# Altium PCB Chiller.PcbDoc (part 1 of 2)
Units mil, origin at the board's own origin, x right, y up, seen from the top; angles counter-clockwise.
Board outline 5081 x 4370 mil, 2 copper layers (Top Layer, Bottom Layer); 139 components, 120 nets, 485 pads, 196 vias.
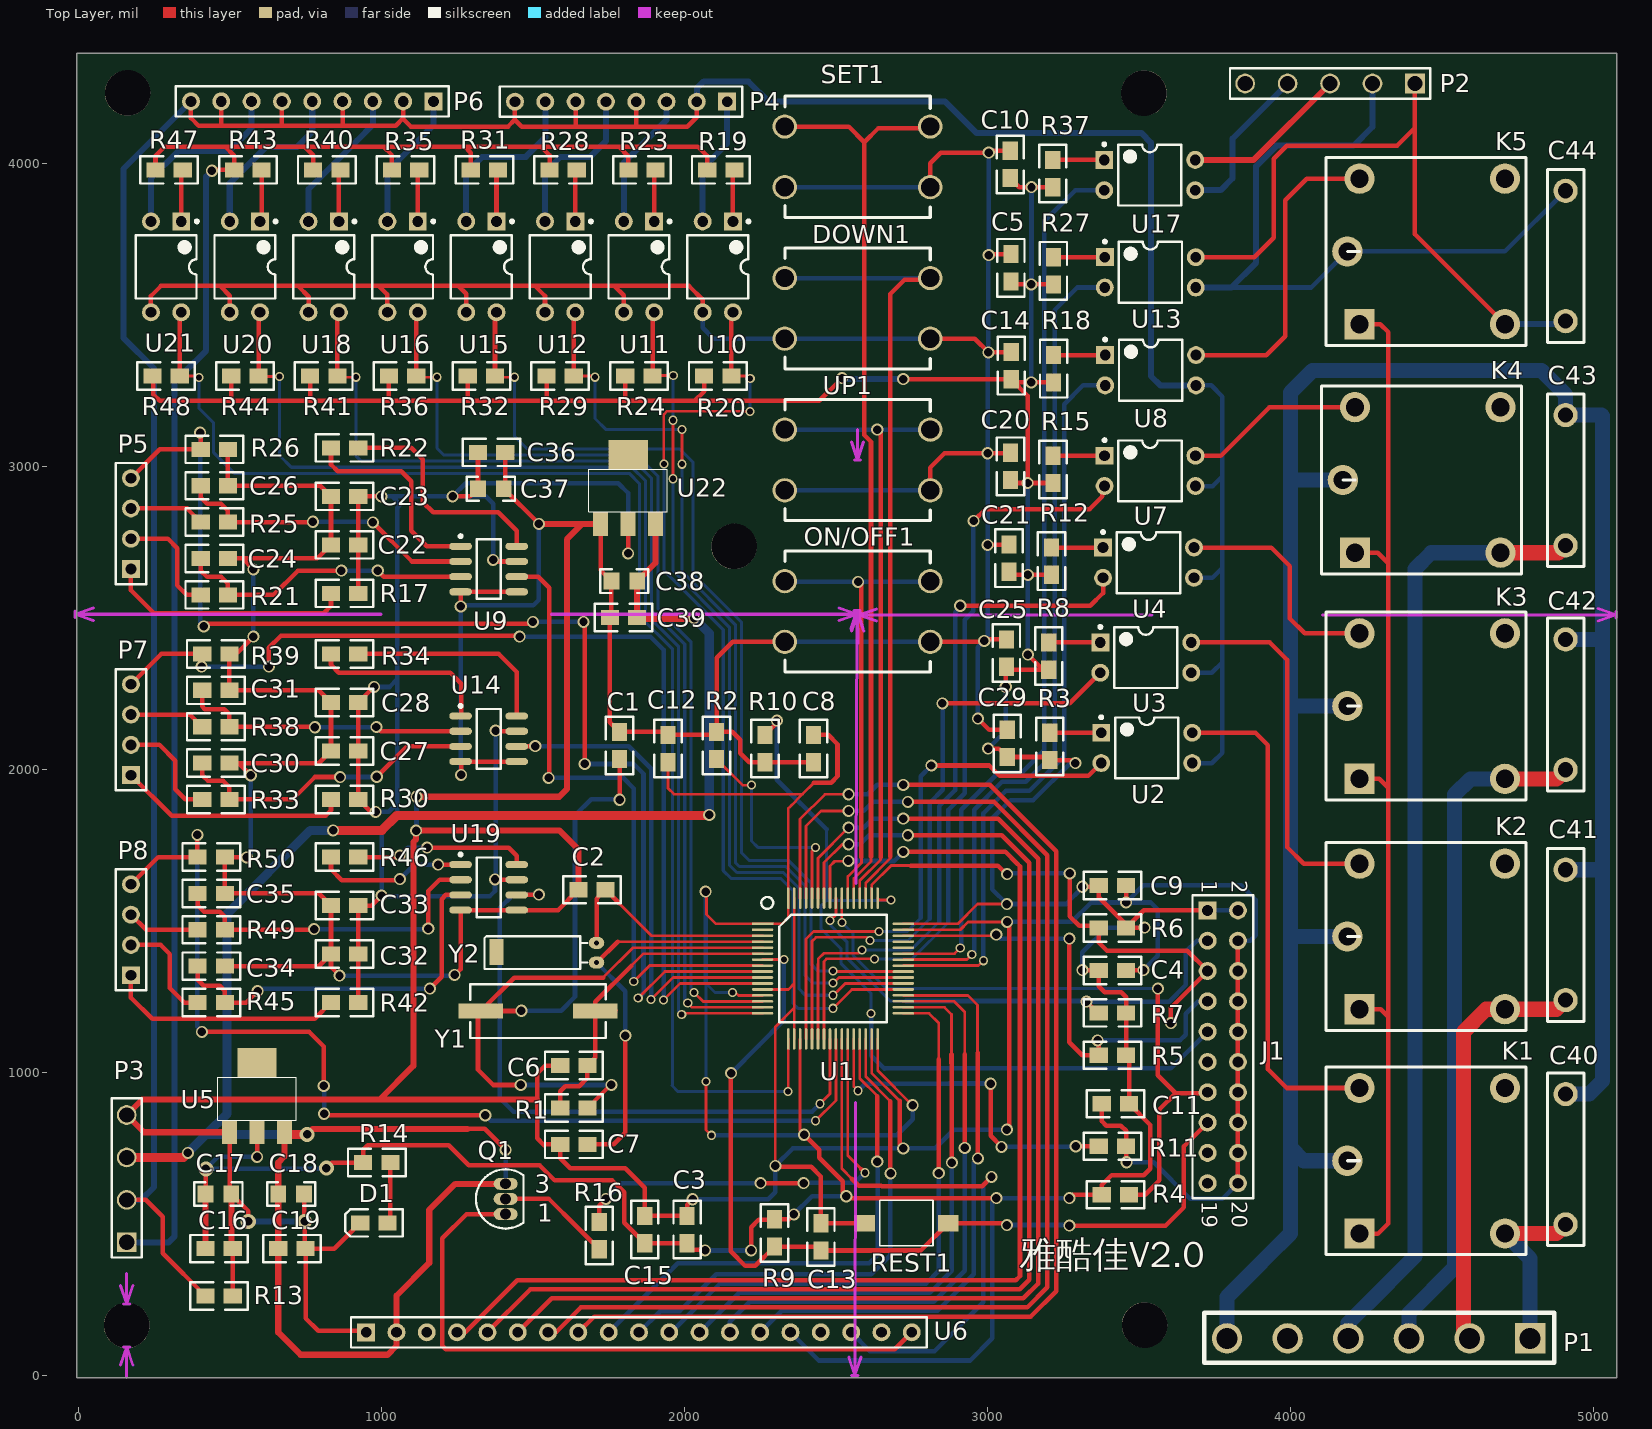
[diagram p0: Top Layer view]
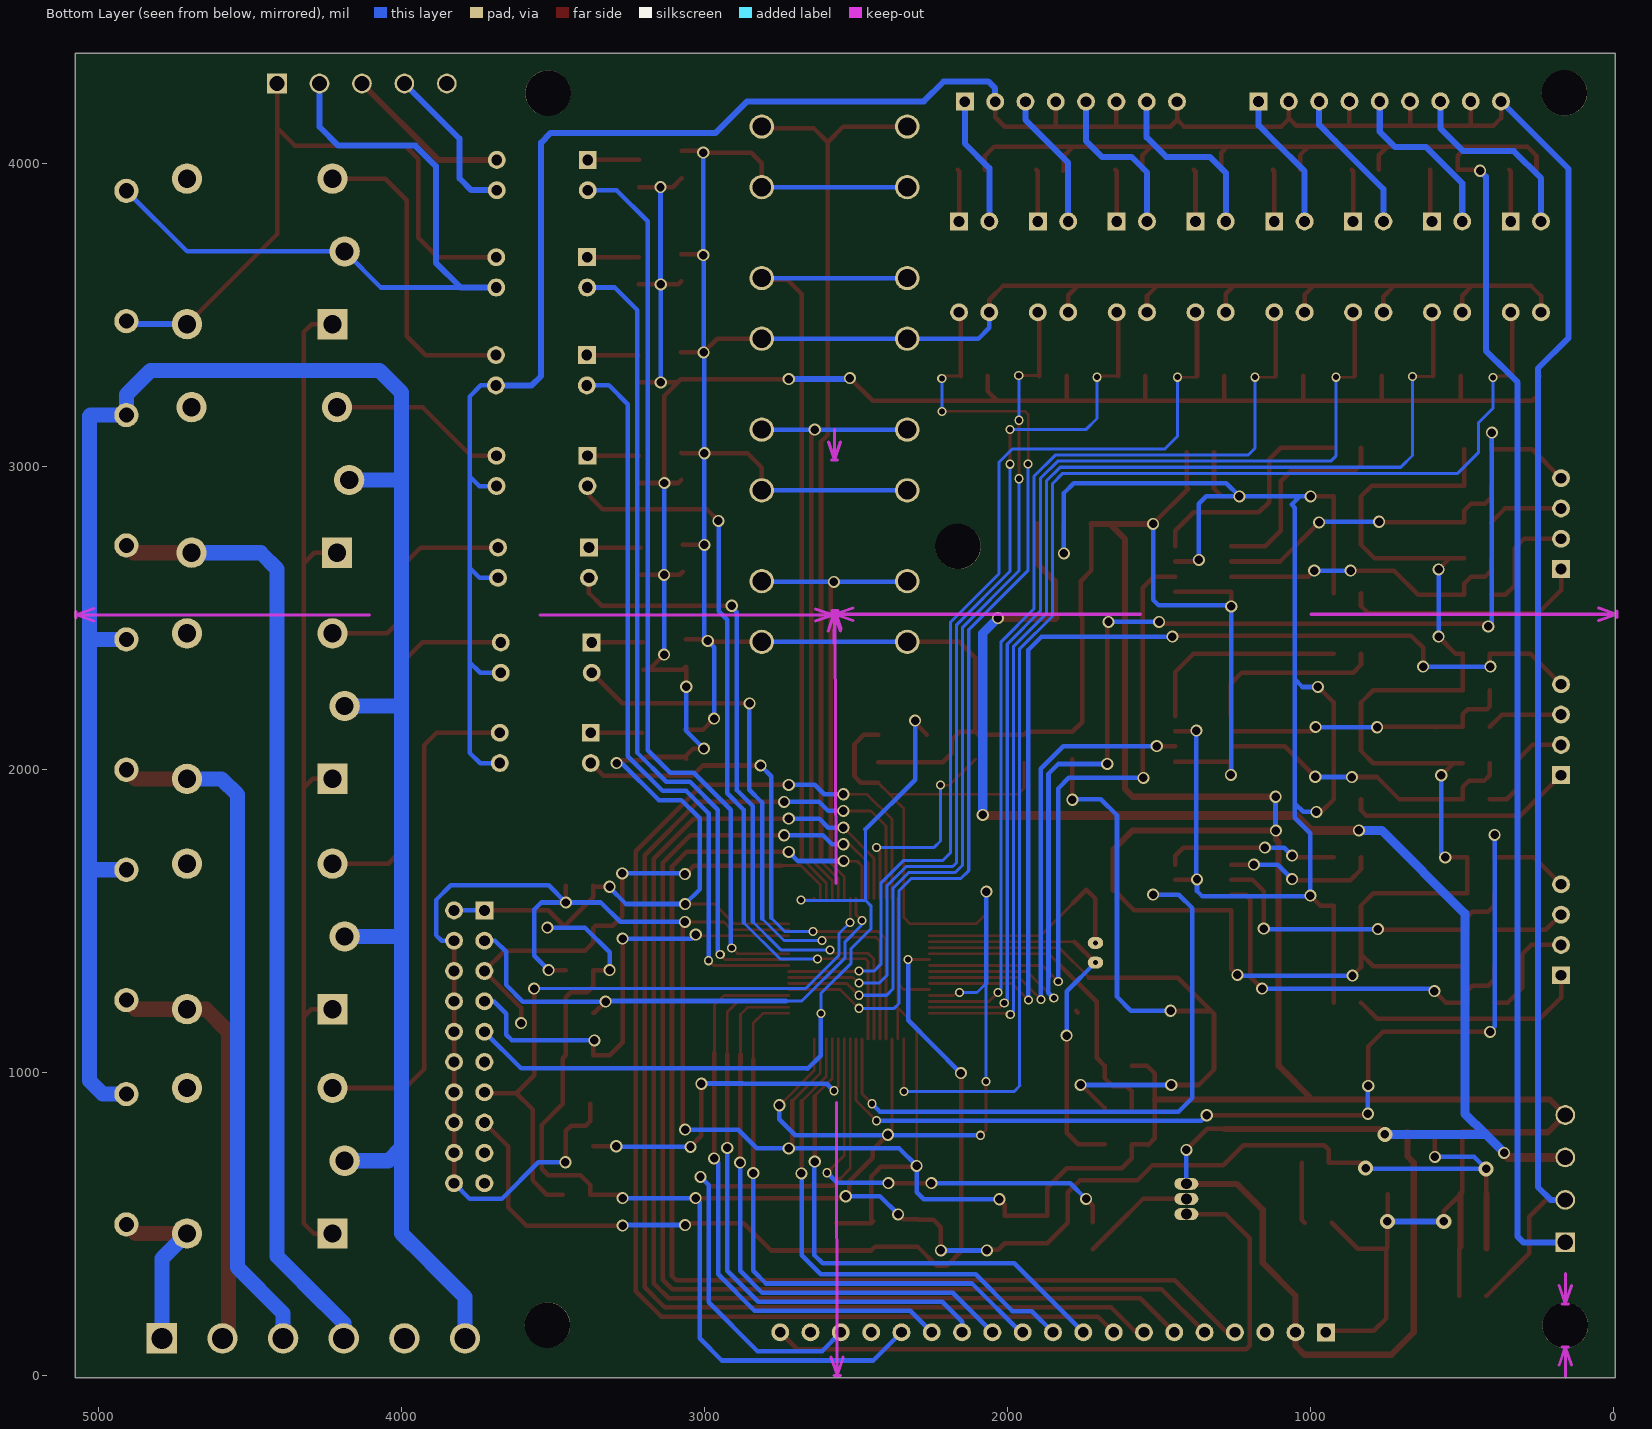
[diagram p1: Bottom Layer view, seen from below]

## Layer stack, top to bottom
Top Layer: signal copper 1.4
Dielectric: dielectric 12.6, FR-4, Dk 4.8
Bottom Layer: signal copper 1.4

## Board outline
-5,4363 5076,4363 5076,-7 -5,-7 -5,4363

## Design rules (kind name [scope] priority, off if disabled: settings)
Clearance [All] p1: gap=10
PolygonConnect [All] p1: connectstyle=Relief reliefconductorwidth=10 reliefentries=4 polygonreliefangle="90 Angle"
RoutingVias [All] p1: holewidth=28 width=50 viastyle="Through Hole" minholewidth=20 minwidth=30 maxholewidth=28 maxwidth=50
SilkscreenOverComponentPads [All] p1: minsilkscreentomaskgap=10
SolderMaskExpansion [All] p1: expansion=4
Width [All] p1: maxlimit=50 minlimit=5 preferedwidth=10
27 further rules are at their usual default settings.

## Components (designator, comment, footprint, x,y, rotation, side; value= is the part's Value field where it differs from the comment)
C1 "20pF" 0805 1786,2124 r270 top
C2 "12pF" 0805 1650,1603 r0 top
C3 "104" 0805 2009,527 r270 top
C4 "104" 0805 3367,1337 r0 top
C5 "0.1uF" 0805 3077,3700 r270 top
C6 "20pF" 0805 1590,1023 r0 top
C7 "12pF" 0805 1590,763 r0 top
C8 "104" 0805 2426,2024 r90 top
C9 "104" 0805 3367,1617 r0 top
C10 "0.1uF" 0805 3075,4041 r270 top
C11 "104" 0805 3467,897 r180 top
C12 "104" 0805 1946,2024 r90 top
C13 "104" 0805 2450,503 r270 top
C14 "0.1uF" 0805 3078,3377 r270 top
C15 "104" 0805 1869,437 r90 top
C16 "104" 0805 420,419.03 r0 top
C17 "106" RC0805 420,599.03 r0 top
C18 "106" RC0805 660,599.03 r0 top
C19 "104" 0805 660,419.03 r0 top
C20 "0.1uF" 0805 3076,3045 r270 top
C21 "0.1uF" 0805 3071,2742 r270 top
C22 "0.1uF" 0805 834,2741 r0 top
C23 "0.1uF" 0805 834,2901 r0 top
C24 "0.1uF" 0805 404,2696 r0 top
C25 "0.1uF" 0805 3062,2429 r270 top
C26 "0.1uF" 0805 404,2936 r0 top
C27 "0.1uF" 0805 834,2061 r0 top
C28 "0.1uF" 0805 834,2221 r0 top
C29 "0.1uF" 0805 3065,2131 r270 top
C30 "0.1uF" 0805 409,2021 r0 top
C31 "0.1uF" 0805 409,2261 r0 top
C32 "0.1uF" 0805 834,1391 r0 top
C33 "0.1uF" 0805 834,1551 r0 top
C34 "0.1uF" 0805 394,1351 r0 top
C35 "0.1uF" 0805 394,1591 r0 top
C36 "104" 0805 1319,3046 r0 top
C37 "106" RC0805 1319,2926 r0 top
C38 "106" RC0805 1844,2621 r180 top
C39 "104" 0805 1844,2501 r180 top
C40 "0.1uF" cccc 4907,929 r0 top
C41 "0.1uF" cccc 4907,1669 r0 top
C42 "0.1uF" cccc 4907,2429 r0 top
C43 "0.1uF" cccc 4907,3169 r0 top
C44 "0.1uF" cccc 4907,3909 r0 top
D1 "LED0" LED0805 1020,504.03 r180 top
DOWN1 "SW-PB" SW 2331,3421 r180 top
J1 "10X2H" HDR2X10 3726,1535 r270 top
K1 "Relay-SPST" JQC-3FF 4227,469 r0 top
K2 "Relay-SPST" JQC-3FF 4227,1209 r0 top
K3 "Relay-SPST" JQC-3FF 4227,1969 r0 top
K4 "Relay-SPST" JQC-3FF 4212,2715 r0 top
K5 "Relay-SPST" JQC-3FF 4227,3469 r0 top
ON/OFF1 "SW-PB" SW 2331,2421 r180 top
P1 "Header 6H" 7P 4790,123 r270 top
P2 "Header 5" P5 4410,4263 r180 top
P3 "CON4" P4 160,440 r90 top
P4 "Header 8" HDR1X8 2141,4203 r180 top
P5 "CON4" 2.54X4 174,2661 r90 top
P6 "Header 9" HDR1X9 1172,4204 r180 top
P7 "CON4" 2.54X4 174,1981 r90 top
P8 "CON4" 2.54X4 174,1321 r90 top
Q1 "8050" BCY-W3/E4 1410,583 r0 top
R1 "1M" 0805 1590,883 r0 top
R2 "10K" 0805 2106,2124 r270 top
R3 "499" 0805 3205,2031 r90 top
R4 "10K" 0805 3467,597 r180 top
R5 "10K" 0805 3367,1057 r0 top
R6 "10K" 0805 3367,1477 r0 top
R7 "10K" 0805 3367,1197 r0 top
R8 "499" 0805 3202,2329 r90 top
R9 "10K" 0805 2297,426 r90 top
R10 "10K" 0805 2266,2024 r90 top
R11 "10K" 0805 3367,757 r0 top
R12 "499" 0805 3211,2642 r90 top
R13 "0" 0805 510,263 r180 top
R14 "510R" 0805 1030,703 r180 top
R15 "499" 0805 3216,2945 r90 top
R16 "1K" 0805 1719,507 r270 top
R17 "2.0K 0.1% 25ppm" 0805 834,2581 r0 top
R18 "499" 0805 3218,3277 r90 top
R19 "1K" 0805 2165,3978 r180 top
R20 "10K" 0805 2065,3298 r0 top
R21 "1.0K" 0805 404,2576 r0 top
R22 "10.0K 0.1% 25ppm" 0805 834,3061 r0 top
R23 "1K" 0805 1905,3978 r180 top
R24 "10K" 0805 1805,3298 r0 top
R25 "1.0K" 0805 404,2816 r0 top
R26 "1.0K 0.1% 25ppm" 0805 404,3056 r0 top
R27 "499" 0805 3217,3600 r90 top
R28 "1K" 0805 1645,3978 r180 top
R29 "10K" 0805 1545,3298 r0 top
R30 "2.0K 0.1% 25ppm" 0805 834,1901 r0 top
R31 "1K" 0805 1385,3978 r180 top
R32 "10K" 0805 1285,3298 r0 top
R33 "1.0K" 0805 409,1901 r0 top
R34 "10.0K 0.1% 25ppm" 0805 834,2381 r0 top
R35 "1K" 0805 1125,3978 r180 top
R36 "10K" 0805 1025,3298 r0 top
R37 "499" 0805 3215,3921 r90 top
R38 "1.0K" 0805 409,2141 r0 top
R39 "1.0K 0.1% 25ppm" 0805 409,2381 r0 top
R40 "1K" 0805 865,3978 r180 top
R41 "10K" 0805 765,3298 r0 top
R42 "2.0K 0.1% 25ppm" 0805 834,1231 r0 top
R43 "1K" 0805 605,3978 r180 top
R44 "10K" 0805 505,3298 r0 top
R45 "1.0K" 0805 394,1231 r0 top
R46 "10.0K 0.1% 25ppm" 0805 834,1711 r0 top
R47 "1K" 0805 345,3978 r180 top
R48 "10K" 0805 245,3298 r0 top
R49 "1.0K" 0805 394,1471 r0 top
R50 "1.0K 0.1% 25ppm" 0805 394,1711 r0 top
REST1 "" SW-SPST 2870,503 r180 top
SET1 "SW-PB" SW 2331,3921 r180 top
U1 "STM32F103RCT6" QFP-64 2490,1343 r0 top
U2 "PC817" DIP-4 3525,2071 r0 top
U3 "PC817" DIP-4 3522,2369 r0 top
U4 "PC817" DIP-4 3531,2682 r0 top
U5 "AMS1117-3.3" SOT223 590,984.03 r0 top
U6 "LCD12864" HDR1X19 950,143 r0 top
U7 "PC817" DIP-4 3536,2985 r0 top
U8 "PC817" DIP-4 3538,3317 r0 top
U9 "AD623AR" SOIC127P600-8L 1354,2661 r0 top
U10 "PC817" DIP-4 2110,3658 r270 top
U11 "PC817" DIP-4 1850,3658 r270 top
U12 "PC817" DIP-4 1590,3658 r270 top
U13 "PC817" DIP-4 3537,3640 r0 top
U14 "AD623AR" SOIC127P600-8L 1354,2101 r0 top
U15 "PC817" DIP-4 1330,3658 r270 top
U16 "PC817" DIP-4 1070,3658 r270 top
U17 "PC817" DIP-4 3535,3961 r0 top
U18 "PC817" DIP-4 810,3658 r270 top
U19 "AD623AR" SOIC127P600-8L 1354,1611 r0 top
U20 "PC817" DIP-4 550,3658 r270 top
U21 "PC817" DIP-4 290,3658 r270 top
U22 "AMS1117-3.3" SOT223 1814,2991 r0 top
UP1 "SW-PB" SW 2331,2921 r180 top
Y1 "8MHz" smt-xtal 1330,1203 r0 top
Y2 "32.768k" 32.768k 1710,1363 r90 top

## Footprints (in the part's own frame and the unit in brackets; to place one, negate y for a bottom-side part, rotate by r counter-clockwise, add the part's x,y. Pads: shape width x height; smd on the part's side, far side on the other; paste and mask are expansions set on the pad)
2.54X4 [mm]
  rect 1.5x1.5 hole 0.9: 1(0,0)
  round 1.5 hole 0.9: 2(2.54,0) 3(5.08,0) 4(7.62,0)
  silkscreen extent -1.27,-1.27 8.89,1.27
7P [mil]
  rect 100x100 hole 70: 1(0,0)
  round 100 hole 70: 2(0,-200) 3(0,-400) 4(0,-600) 5(0,-800) 6(0,-1000)
  silkscreen extent -85,-1075 80,80
32.768k [mm]
  oval 1x1.3 hole 0.4: 1(0,0) 2(1.64,0)
  rect 2.2x1.2 smd: 3(0.875,8.382)
  silkscreen extent -0.53,0.76 2.2,9.4
0805 [mil]
  rect 60x50 smd: 1(0,0) 2(90,0)
  silkscreen extent -50,-45 140,45
BCY-W3/E4 [mm] "TO, Flat Index; 3 In-Line, Axial Leads; Body Dia. 4.5mm; Leads 0.51 x 0.48 mm (max)"
  oval 2x1 hole 0.9: 1(0,-1.27) 2(0,0) 3(0,1.27)
  silkscreen extent -2.48,-2.48 1.5,2.48
cccc [mil]
  round 80 hole 50: 1(0,0) 2(0,-430)
  silkscreen extent -60,-500 60,70
DIP-4 [mm] "DIP; 4 Leads; Row Spacing 7.62 mm; Pitch 2.54 mm"
  rect 1.5x1.5 hole 0.9: 1(-3.81,1.27)
  round 1.5 hole 0.9: 2(-3.81,-1.27) 3(3.81,-1.27) 4(3.81,1.27)
  silkscreen extent -3.93,-2.55 2.65,2.69, body extent -3.15,-2.5 3.15,2.5, height 5.6
HDR1X8 [mm] "Connector; Header; 8 Position"
  rect 1.5x1.5 hole 0.9: 1(0,0)
  round 1.5 hole 0.9: 2(2.54,0) 3(5.08,0) 4(7.62,0) 5(10.16,0) 6(12.7,0) 7(15.24,0) 8(17.78,0)
  silkscreen extent -1.27,-1.27 19.05,1.27
HDR1X9 [mm] "Connector; Header; 9 Position"
  rect 1.5x1.5 hole 0.9: 1(0,0)
  round 1.5 hole 0.9: 2(2.54,0) 3(5.08,0) 4(7.62,0) 5(10.16,0) 6(12.7,0) 7(15.24,0) 8(17.78,0) 9(20.32,0)
  silkscreen extent -1.27,-1.27 21.59,1.27
HDR1X19 [mm] "Connector; Header; 19 Position"
  rect 1.5x1.5 hole 0.9: 1(0,0)
  round 1.5 hole 0.9: 2(2.54,0) 3(5.08,0) 4(7.62,0) 5(10.16,0) 6(12.7,0) 7(15.24,0) 8(17.78,0) 9(20.32,0) 10(22.86,0) 11(25.4,0) 12(27.94,0) 13(30.48,0) 14(33.02,0) 15(35.56,0) 16(38.1,0) 17(40.64,0) 18(43.18,0) 19(45.72,0)
  silkscreen extent -1.27,-1.27 46.99,1.27
HDR2X10 [mm] "Connector; Header; 10x2 Position"
  rect 1.5x1.5 hole 0.9: 1(0,0)
  round 1.5 hole 0.9: 2(0,2.54) 3(2.54,0) 4(2.54,2.54) 5(5.08,0) 6(5.08,2.54) 7(7.62,0) 8(7.62,2.54) 9(10.16,0) 10(10.16,2.54) 11(12.7,0) 12(12.7,2.54) 13(15.24,0) 14(15.24,2.54) 15(17.78,0) 16(17.78,2.54) 17(20.32,0) 18(20.32,2.54) 19(22.86,0) 20(22.86,2.54)
  silkscreen extent -1.27,-1.27 24.13,3.81
JQC-3FF [mil]
  round 100 hole 60: 1(480,0) 2(-40,240) 4(0,480) 5(480,480)
  rect 100x100 hole 60: 3(0,0)
  silkscreen extent -110,-70 550,550
LED0805 [mil] "0805"
  rect 60x50 smd: 1(-0.28,-0.09) 2(89.72,-0.09)
  silkscreen extent -50,-45 140,45
P4 [mil]
  rect 65x65 hole 50: 1(0,0)
  round 65 hole 50: 2(140,0) 3(280,0) 4(420,0)
  silkscreen extent -50,-50 475,50
P5 [mil]
  rect 65x65 hole 50: 1(0,0)
  round 65 hole 50: 2(140,0) 3(280,0) 4(420,0) 5(560,0)
  silkscreen extent -50,-50 610,50
QFP-64 [mm]
  rect 1.8x0.22 smd: 1(-5.904,3.752)
  oval 1.8x0.22 smd: 2(-5.904,3.252) 3(-5.904,2.752) 4(-5.904,2.252) 5(-5.904,1.752) 6(-5.904,1.252) 7(-5.904,0.752) 8(-5.904,0.252) 9(-5.904,-0.248) 10(-5.904,-0.748) 11(-5.904,-1.248) 12(-5.904,-1.748) 13(-5.904,-2.248) 14(-5.904,-2.748) 15(-5.904,-3.248) 16(-5.904,-3.748) 33(5.896,-3.748) 34(5.896,-3.248) 35(5.896,-2.748) 36(5.896,-2.248) 37(5.896,-1.748) 38(5.896,-1.248) 39(5.896,-0.748) 40(5.896,-0.248) 41(5.896,0.252) 42(5.896,0.752) 43(5.896,1.252) 44(5.896,1.752) 45(5.896,2.252) 46(5.896,2.752) 47(5.896,3.252) 48(5.896,3.752)
  oval 0.22x1.8 smd: 17(-3.754,-5.898) 18(-3.254,-5.898) 19(-2.754,-5.898) 20(-2.254,-5.898) 21(-1.754,-5.898) 22(-1.254,-5.898) 23(-0.754,-5.898) 24(-0.254,-5.898) 25(0.246,-5.898) 26(0.746,-5.898) 27(1.246,-5.898) 28(1.746,-5.898) 29(2.246,-5.898) 30(2.746,-5.898) 31(3.246,-5.898) 32(3.746,-5.898) 49(3.746,5.902) 50(3.246,5.902) 51(2.746,5.902) 52(2.246,5.902) 53(1.746,5.902) 54(1.246,5.902) 55(0.746,5.902) 56(0.246,5.902) 57(-0.254,5.902) 58(-0.754,5.902) 59(-1.254,5.902) 60(-1.754,5.902) 61(-2.254,5.902) 62(-2.754,5.902) 63(-3.254,5.902) 64(-3.754,5.902)
  silkscreen extent -6,-4.5 4.5,6
RC0805 [mil]
  rect 52x56 smd: 1(0,0) 2(85,0)
  silkscreen extent -37,-39 122,39
smt-xtal [mil]
  rect 146x51 smd: 1(-2,0) 2(376,0)
  silkscreen extent -37,-89 411,89
SOIC127P600-8L [mm] "SOIC, 8-Leads, Body 4.9x3.9mm, Pitch 1.27mm, IPC High Density"
  oval 1.9x0.6 smd: 1(-2.35,1.905) 2(-2.35,0.635) 3(-2.35,-0.635) 4(-2.35,-1.905) 5(2.35,-1.905) 6(2.35,-0.635) 7(2.35,0.635) 8(2.35,1.905)
  silkscreen extent -2.47,-2.5 1,2.88, body extent -2,-2.5 2,2.5, height 1.75
SOT223 [mm]
  rect 1.27x2 smd: 1(-2.3,-4.598) 2(0,-4.598) 3(2.3,-4.598)
  rect 3.3x2.5 smd: ""(0,1.2)
  silkscreen extent -3.3,-3.58 3.3,0
SW [mil]
  round 80 hole 60: 1(-480,0) 1(0,0) 2(-480,-200) 2(0,-200)
  silkscreen extent -480,-300 0,100
SW-SPST [mm]
  rect 1.7x1.4 smd: 1(0,0) 2(7,0)
  silkscreen extent 1.27,-1.91 5.71,1.91

## Part data
C1 C2 C6 C7: library part CAP, "CAP CHIP 20P 50V(+-5% C0G 0603)"
C3 C4 C8 C11 C12 C15: library part CAP
C5 C10 C14 C19 C20 C21 C22 C23 C24 C25 C26 C27 C28 C29 C30 C31 C32 C33 C34 C35 C39 C40 C41 C42 C43 C44: library part CAP, "Capacitor"
C9 C13: library part CAP, "GRM39 X7R102K50PT"
C16 C36: library part Cap, "Capacitor"
C17 C18 C37 C38: library part "CAPACITOR POL", "Capacitor"
D1: "Typical INFRARED GaAs LED"
J1: library part "Header 10X2H", "Header, 10-Pin, Dual row, Right Angle"
K1 K2 K3 K4 K5: "Single-Pole Single-Throw Relay"
P1: "Header, 6-Pin, Right Angle"
P2: "Header, 5-Pin"
P3: library part "Header 4", "Header, 4-Pin"
P4: "Header, 8-Pin"
P5 P7 P8: "Connector"
P6: "Header, 9-Pin"
Q1: library part 2N3904, "NPN General Purpose Amplifier"
R1 R2 R3 R4 R5 R6 R7 R8 R9 R10 R11 R12 R13 R15 R16 R18 R19 R20 R23 R24 R27 R28 R29 R31 R32 R35 R36 R37 R40 R41 R43 R44 R47 R48: library part RES
R14: library part R
R17 R21 R22 R25 R26 R30 R33 R34 R38 R39 R42 R45 R46 R49 R50: library part RES2
REST1: library part SW-PB
U1: library part STM32F103RBT6
U2 U3 U4 U7 U8 U10 U11 U12 U13 U15 U16 U17 U18 U20 U21: library part Optoisolator1, "4-Pin Phototransistor Optocoupler"
U5 U22: library part LT1085CM-3.3
U9 U14 U19: library part Component_1
Y1 Y2: library part CRYSTAL, "Crystal 8MHz PLUG"

## Free pads (board coordinates)
  round 150 hole 150: 0(160,166) 0(163,4232) 0(2163.57,2735.57) 0(3516,4231) 0(3518,167)

## Via types
v1: diameter 40, hole 28, Top Layer to Bottom Layer, 144 vias
v2: diameter 30, hole 20, Top Layer to Bottom Layer, 47 vias
v3: diameter 50, hole 28, Top Layer to Bottom Layer, 5 vias

## Nets (pads, with @x,y where several pads share a name; then routed paths per layer and width w, separated by ;. In a path a pad name is that pad's centre, name@x,y a point inside that pad or via, vN(x,y) a via of type N, cw(c..) or ccw(c..) an arc to the next point about the centre after c; other vN are vias at no path point)
+12V: K1.3 K2.3 K3.3 K4.3 K5.3 | length 3493.5
  Top Layer w15: K4.3@4212,2715 4287,2715 4322,2680 ; K1.3@4227,469 4228,468 4288,468 4322,502 4322,1184 ; K2.3@4227,1209 4297,1209 4322,1184 ; K3.3@4227,1969 4292,1969 4322,1939 ; K5.3@4227,3469 4296,3469 4322,3443 4322,3434 4322,2680 ; 4322,1184 4322,1939 ; 4322,1939 4322,2680
BOOT0: R2.2 U1.60 | length 730.9
  Top Layer w9: R2.2@2106,2034 2108,2032 2192,1948 v2(2221,1948) ; U1.60@2420.95,1575.38 2420.95,1730.95 v2(2433,1743)
  Bottom Layer w10: v2(2221,1948) 2221,1764 2242,1743 v2(2433,1743)
  Bottom Layer w15: v2@2430,1743 v2(2433,1743)
BOOT1: R11.1 U1.28 | length 1305.8
  Top Layer w9: U1.28@2558.75,1110.81 2558.75,954.25 v2(2573,940)
  Top Layer w15: v1(3010,963) 3010,791 v1(3046,755) ; v1(3291,757) R11.1@3367,757
  Bottom Layer w15: v2(2573,940) 2596,963 v1(3010,963) 3008,965 2873,965 ; v1(3046,755) 3289,755 v1(3291,757)
COMPRESSOR: C42.2 K3.1 P1.3 | length 2256.5
  Top Layer w50: K3.1@4707,1969 4877,1969 C42.2@4907,1999
  Bottom Layer w50: P1.3@4390,123 4390,206 4541,357 4541,1917 4593,1969 K3.1@4707,1969
DB0: U1.61 U6.7 | length 4273.8
  Top Layer w9: U1.61@2401.27,1575.38 2401.27,1813.27 2451,1863 v1(2541.52,1863)
  Top Layer w15: U6.7@1550,143 1576.42,143 1658.45,225.03 3130.6,225.03 3197,291.43 3197,1717.28 3021.28,1893 v1(2737.5,1893)
  Bottom Layer w15: v1(2541.52,1863) 2592.02,1863 2622.02,1893 v1(2737.5,1893)
DB1: U1.62 U6.8 | length 4327.7
  Top Layer w9: U1.62@2381.58,1575.38 2381.58,1836.01 2463.57,1918 v1(2541.52,1918)
  Top Layer w15: U6.8@1650,143 1702.03,195.03 3143.03,195.03 3227,279 3227,1729.71 3007.71,1949 v1(2722,1949)
  Bottom Layer w15: v1(2541.52,1918) 2604.59,1918 2635.59,1949 v1(2722,1949)
DB2: U1.29 U6.9 | length 1732.3
  Top Layer w9: U1.29@2578.43,1110.81 2578.43,980.18 2636.5,922.11
  Top Layer w15: v1(2636,706.3) 2636.5,706.79 2636.5,922.11
  Bottom Layer w15: U6.9@1750,143 1977.5,370.5 2610.07,370.5 2637.52,397.95 v1@2637.52,705 ; v1(2636,706.3) 2637.3,705 v1@2637.52,705 ; v1@2637.52,706.3 v1@2637.52,705
DB3: U1.30 U6.10 | length 1682.4
  Top Layer w9: U1.30@2598.12,1110.81 2598.12,986.39 2678.5,906
  Top Layer w15: 2678.5,906 2678.5,669.02 v1(2680.02,667.5)
  Bottom Layer w15: U6.10@1850,143 1919.84,212.84 1983.84,212.84 2105,334 2616,334 2679,397 2679,660 2680.02,661.02 v1(2680.02,667.5)
DB4: U1.33 U6.11 | length 1920.4
  Top Layer w9: U1.33@2722.13,1195.46 2806.54,1195.46 2839,1163 2839,1044.55
  Top Layer w15: v1(2839,668) 2839,750.78 2839,989 2839,1044.55
  Bottom Layer w15: U6.11@1950,143 1956.43,143 2117.43,304 2797,304 2839,346 v1(2839,668)
DB5: U1.34 U6.12 | length 1945.7
  Top Layer w9: U1.34@2722.13,1215.14 2857.86,1215.14 2881,1192 2881,1089 2881,1060
  Top Layer w15: 2881,1060 2881,1030 2881.5,1029.5 2881.5,703.28 v1(2882.11,702.67)
  Bottom Layer w15: U6.12@2050,143 2181,274 2810,274 2882,346 2882,593 ; 2881.5,607.5 2882,607 2882,593 ; v1(2882.11,702.67) 2882.11,593.11 2882,593
DB6: U1.35 U6.13 | length 1998
  Top Layer w9: U1.35@2722.13,1234.83 2890.17,1234.83 2924.5,1200.5 2924.5,1087.93 2924.5,1060
  Top Layer w15: 2924.5,938.5 2924.5,986 ; 2924.5,1060 2924.5,986 ; v1(2924.61,751.39) 2924.5,751.5 2924.5,986
  Bottom Layer w15: U6.13@2150,143 2150,178 2216,244 2822.43,244 2925,346.57 2924.61,346.96 v1(2924.61,751.39)
DB7: U1.36 U6.14 | length 1936.7
  Top Layer w9: U1.36@2722.13,1254.51 2935.49,1254.51 2967,1223 2967,1087.85 2967,1065
  Top Layer w15: 2967,1065 2967,1025 2967.5,1024.5 2967.5,717.5 v1(2968,717)
  Bottom Layer w15: U6.14@2250,143 2321,214 2834.85,214 2955,334.15 2955,704 v1(2968,717)
E: U1.59 U6.6 | length 4161.4
  Top Layer w9: U1.59@2440.64,1575.38 2440.64,1707.12 v1(2541.52,1808)
  Top Layer w15: U6.6@1450,143 1562.03,255.03 3118.17,255.03 3167,303.85 3167,1704.85 3034.85,1837 v1@2723,1837 ; v1@2530.79,1808 v1(2541.52,1808)
  Bottom Layer w15: v1(2541.52,1808) 2591.57,1808 2621.57,1838 v1(2722,1838)
EXIN7: P4.1 U10.2 | length 428.6
  Bottom Layer w20: U10.2@2060,3808 2060,3984 2141,4065 P4.1@2141,4203
EXIN8: P4.3 U11.2 | length 453.4
  Bottom Layer w20: U11.2@1800,3808 1800,4002 1941,4143 P4.3@1941,4203
EXIN9: P4.5 U12.2 | length 535.7
  Bottom Layer w20: U12.2@1540,3808 1540,3970 1591,4021 1689,4021 1741,4073 P4.5@1741,4203
EXIN10: P4.7 U15.2 | length 587.5
  Bottom Layer w20: U15.2@1280,3808 1280,3968 1333,4021 1477,4021 1541,4085 P4.7@1541,4203
EXIN11: P6.1 U16.2 | length 459
  Bottom Layer w20: U16.2@1020,3808 1020,3973 1121,4074 1172,4125 P6.1@1172,4204
EXIN12: P6.3 U18.2 | length 485.2
  Bottom Layer w15: P6.3@971,4203 P6.3@972,4204
  Bottom Layer w20: U18.2@760,3808 760,3915 920,4075 972,4127 P6.3@972,4204
EXIN13: P6.5 U20.2 | length 624.4
  Bottom Layer w15: 637,4055 693,4055
  Bottom Layer w20: U20.2@500,3808 500,3934 619,4053 620,4054 722,4054 772,4104 P6.5@772,4204
EXIN14: P6.7 U21.2 | length 634.2
  Bottom Layer w15: P6.7@570,4202 P6.7@572,4204
  Bottom Layer w20: U21.2@240,3808 240,3950 329.6,4039.6 496.6,4039.6 572,4115 P6.7@572,4204
FAN: C43.2 K4.1 P1.4 | length 3158.4
  Top Layer w50: K4.1@4692,2715 4883,2715 C43.2@4907,2739
  Bottom Layer w50: P1.4@4190,123 4190,174 4314,298 4339,323 4410,394 4410,2661 4464,2715 K4.1@4692,2715
GND: C1.1 C2.1 C3.1 C4.2 C5.1 C6.1 C7.1 C8.1 C9.2 C10.1 C11.2 C12.2 C13.1 C14.1 C15.2 C16.2 C17.2 C18.2 C19.2 C20.1 C21.1 C22.1 C23.1 C24.2 C25.1 C26.2 C27.1 C28.1 C29.1 C30.2 C31.2 C32.1 C33.1 C34.2 C35.2 C36.2 C37.2 C38.2 C39.2 D1.2 DOWN1.1 J1.4 J1.6 J1.8 J1.10 J1.12 J1.14 J1.16 J1.18 J1.20 ON/OFF1.1 P3.4 R2.1 R10.1 R11.2 R13.1 R26.2 R39.2 R50.2 REST1.2 SET1.1 U1.12 U1.18 U1.31 U1.47 U1.63 U5.1 U6.1 U9.4 U9.5 U10.3 U11.3 U12.3 U14.4 U14.5 U15.3 U16.3 U18.3 U19.4 U19.5 U20.3 U21.3 U22.1 UP1.1 | length 31833.7
  Top Layer w9: U1.12@2257.57,1274.2 2342.7,1274.2 2361.5,1293 ; v1(2300,692) 2300,1151 2361.5,1212.5 ; U1.18@2361.9,1111.61 U1.63@2361.9,1575.38 ; U1.31@2617.8,1110.81 2617.8,999.2 2710,907 ; U1.47@2722.13,1471.05 2910.05,1471.05 2936,1497 v1@3062.9,1497
  Top Layer w15: U21.3@240,3508 240,3562 273,3595 468,3595 ; C34.2@484,1351 794,1351 C32.1@834,1391 ; C24.2@494,2696 542,2696 ; R26.2@494,3056 C26.2@494,2936 799,2936 C23.1@834,2901 C22.1@834,2741 789,2696 542,2696 ; C30.2@499,2021 529,2021 ; U5.1@499.45,803 499.45,604.58 C17.2@505,599.03 561,543.03 v3(561,509) ; U20.3@500,3508 500,3563 468,3595 ; C16.2@505,424.03 C16.2@510,419.03 R13.1@510,263 ; v1(556,1710) 485,1710 R50.2@484,1711 C35.2@484,1591 489,1591 794,1591 C33.1@834,1551 C32.1@834,1391 ; v1(569,1981) 529,2021 ; v1(578,2438) 521,2381 R39.2@499,2381 C31.2@499,2261 794,2261 C28.1@834,2221 C27.1@834,2061 794,2021 529,2021 ; v1(578,2660) 542,2696 ; C18.2@745,599.03 745,511 v3(747,509) 747,422.03 C19.2@750,419.03 ; U18.3@760,3508 760,3560 725,3595 ; v1(862,1320) 834,1348 C32.1@834,1391 ; D1.2@930.28,504.12 845.18,419.03 C19.2@750,419.03 ; U6.1@950,143 945,148 792,148 750,190 C19.2@750,419.03 ; U16.3@1020,3508 1020,3567 992,3595 ; v1(1242,1322) 1261.48,1341.48 U19.4@1261.48,1536 U19.5@1446.52,1536 1583,1536 C2.1@1650,1603 ; v1(1262,2538) 1262,2585.48 U9.4@1261.48,2586 U9.5@1446.52,2586 ; v1(1263,1982) 1263,2024.48 U14.4@1261.48,2026 U14.5@1446.52,2026 ; U15.3@1280,3508 1280,3569 1254,3595 ; C36.2@1409,3046 1409,2931 C37.2@1404,2926 v1(1520.02,2809.98) ; 1536,761 1514,783 1514,997 1540,1023 C6.1@1590,1023 ; 1538,763 C7.1@1590,763 1590,717 1623,684 1805,684 1869,620 1869,585 ; U12.3@1540,3508 1540,3562 1507,3595 ; U22.1@1723.45,2809.98 1723.45,2656.55 C38.2@1759,2621 1759,2506 C39.2@1754,2501 1754,2156 C1.1@1786,2124 1936,2124 C12.2@1946,2114 2096,2114 R2.1@2106,2124 ; U11.3@1800,3508 1800,3564 1769,3595 ; C15.2@1869,548 C15.2@1869,527 ; 1869,599 1869,585 ; v1(2027,582) 2009,564 C3.1@2009,527 C15.2@1869,527 ; U10.3@2060,3508 2060,3550 2015,3595 1769,3595 ; v1@2303,689 2418,689 2450,657 C13.1@2450,503 ; ON/OFF1.1@2331,2421 2159,2421 2106,2368 R2.1@2106,2124 ; C8.1@2426,2024 R10.1@2266,2024 2214,2024 2184,2054 2184,2098 2158,2124 R2.1@2106,2124 ; C13.1@2444,509 C13.1@2450,503 ; REST1.2@2564.41,503 C13.1@2450,503 ; v1@2710,762 2710,907 ; ON/OFF1.1@2811,2421 2986,2421 v1(2989,2424) 2994,2429 C25.1@3062,2429 ; UP1.1@2811,2921 2811,2996 2858,3043 v1(3000,3043) 3074,3043 C20.1@3076,3045 ; DOWN1.1@2811,3421 2958,3421 v1(3003,3376) 3077,3376 C14.1@3078,3377 ; SET1.1@2811,3921 2811,4000 2846,4035 v1(3004,4035) 3010,4041 C10.1@3075,4041 ; v1(2968,2168) 3005,2131 C29.1@3065,2131 ; v1(3000,2741) 3068,2741 3070,2743 C21.1@3071,2742 ; v1(3004,3697) 3007,3700 C5.1@3077,3700 ; v1@3071,819 v1@3071,1488.9 ; C11.2@3377,897 3377,840 3392,825 3440,825 3457,808 R11.2@3457,757 3457,706 v1(3459,704) ; C4.2@3457,1337 3458,1338 v1(3514,1338) ; v1(3457,1561) C9.2@3457,1617 ; J1.20@3826,635 J1.18@3826,735 J1.16@3826,835 J1.14@3826,935 J1.12@3826,1035 J1.10@3826,1135 J1.8@3826,1235 J1.6@3826,1335 J1.4@3826,1435 ; 468,3595 725,3595 ; 725,3595 992,3595 ; 992,3595 1254,3595 ; 1254,3595 1507,3595 ; 1507,3595 1769,3595 ; C15.2@1869,527 1869,585
  Top Layer w20: U5.1@499.45,803 217,803 P3.4@160,860 211,911 258,911 995,911 ; C16.2@505,424.03 C17.2@505,599.03 ; v1(1116,1910) 1587,1910 1612,1935 1612,2758.98 1663,2809.98 ; 1513,911 995,911 ; v1(1520.02,2809.98) 1663,2809.98 ; C2.1@1650,1603 1650,1736 1588,1798 v1(1115,1798) 1115,1769.64 1106,1760.64 1106,1022 995,911 ; U22.1@1723.45,2809.98 1663,2809.98
  Bottom Layer w15: v1(556,1710) 569,1723 v1(569,1981) ; v1(578,2438) v1(578,2660) ; v1(862,1320) 1240,1320 v1(1242,1322) ; v1@1116,1799 v1(1116,1910) ; v1@1262,1983 v1(1262,2538) ; v1@1265,2541 1501,2541 1520.02,2560.02 v1(1520.02,2809.98) ; v1(2027,582) 2277,582 2300,605 v1(2300,692) 2358,750 v1(2722,750) 2827,750 2888,811 v1@3063,811 ; U10.3@2060,3508 2060,3457 2096,3421 DOWN1.1@2331,3421 DOWN1.1@2811,3421 ; ON/OFF1.1@2331,2421 ON/OFF1.1@2811,2421 ; UP1.1@2331,2921 UP1.1@2811,2921 ; SET1.1@2331,3921 SET1.1@2811,3921 ; v1(2968,2168) 2968,2403 v1(2989,2424) 3000,2435 v1(3000,2741) v1(3000,3043) 3000,3373 v1(3003,3376) 3003,3696 v1(3004,3697) v1(3004,4035) ; v1(3064.5,1497) 3278.1,1497 3342.1,1561 v1(3457,1561) ; v1(3459,704) 3548,704 3669.03,582.97 3773.97,582.97 J1.20@3826,635 ; v1(3514,1338) 3561,1385 3561,1538 3538,1561 v1(3457,1561) ; J1.4@3826,1435 3867,1435 3885.51,1453.51 3885.51,1569.49 3837,1618 3514,1618 v1(3457,1561)
  Bottom Layer w20: v3(561,509) v3(747,509)
  other v1: 3064,812
GND_12V: P3.2 P4.2 P4.4 P4.6 P4.8 P6.2 P6.4 P6.6 P6.8 P6.9 R13.2 U2.3 U3.3 U4.3 U7.3 U8.3 | length 10935.5
  Top Layer w15: P3.2@160,580 223,580 279,524 279,404 R13.2@420,263 ; P6.9@372,4204 372,4149 397,4124 471,4124 ; P6.8@472,4204 472,4125 471,4124 ; P6.6@672,4204 672,4124 ; P6.4@872,4204 872,4126 874,4124 ; P6.2@1072,4204 1072,4149 ; P4.8@1441,4203 1440,4202 1440,4143 ; P4.6@1641,4203 1641,4120 ; P4.4@1841,4203 1841,4122 1843,4120 ; P4.2@2041,4203 2041,4152 2009,4120 1843,4120 ; 471,4124 672,4124 ; 672,4124 874,4124 ; 874,4124 1047,4124 1072,4149 ; 1072,4149 1072,4146 1097,4121 1418,4121 1440,4143 ; 1440,4143 1463,4120 1641,4120 ; 1641,4120 1843,4120
  Bottom Layer w15: U3.3@3672,2319 3740,2319 3775,2354 ; U2.3@3675,2021 3739,2021 3740,2020 3775,2055 3775,2354 ; U4.3@3681,2632 3742,2632 3775,2665 ; U7.3@3686,2935 3743,2935 3775,2967 ; U8.3@3688,3267 3738,3267 3775,3230 3775,2967 ; 3775,2354 3775,2665 ; 3775,2665 3775,2967
  Bottom Layer w20: P3.2@160,580 208,580 250,622 250,3323 149,3424 149,3981 P6.9@372,4204 ; P4.2@2041,4203 2041,4247 2064,4270 2212,4270 ; 2212,4268 2276,4204 2859,4204 2964,4099 3508,4099 3539,4068 3539,3298 3570,3267 U8.3@3688,3267
HEATER: P1.5
JTCK/SWCLK: J1.9 R10.2 U1.49 | length 2752.5
  Top Layer w9: U1.49@2637.49,1575.38 2643.87,1569 v2(2682,1569)
  Top Layer w15: R10.2@2266,2114 2305,2153 v1(2305,2161)
  Bottom Layer w10: 2469,1802 2469,1568 ; v2(2616,1195) 2616,1261 2515.93,1361.07 2515.93,1409.07 2450,1475 2450,1549 2469,1568 ; v2(2682,1569) 2681,1568 2469,1568
  Bottom Layer w15: v1(2305,2161) 2305,1966 2469,1802 ; v2(2616,1195) 2616,1056 2660,1012 2662,1014 3605,1014 J1.9@3726,1135
JTDI/PA15: J1.5 R6.1 U1.50 | length 1657.8
  Top Layer w9: U1.50@2617.8,1575.38 2617.8,1618.53 2682.27,1683 2735.55,1683 2746,1683
  Top Layer w15: 2746,1683 3034,1683 3062.5,1654.5 v1(3064.5,1654.5) ; v1(3271,1657) 3270.5,1656.5 3270.5,1516 3302,1484.5 3359.5,1484.5 R6.1@3367,1477 3367,1429 3394,1402 3659,1402 J1.5@3726,1335 3605,1214 v1(3605,1163)
  Bottom Layer w15: v1(3064.5,1654.5) 3067,1657 v1(3271,1657)
JTDO/PB3: J1.13 R4.1 U1.55 | length 2163.5
  Top Layer w9: U1.55@2519.38,1575.38 2519.38,1495.62 v2(2520,1495)
  Top Layer w15: R4.1@3467,597 3520,597 3567,644 3567,878 3621,932 ; v1(3562,1277) 3562,991 3621,932 ; J1.13@3726,935 3723,932 3621,932
  Bottom Layer w10: v2(2520,1495) 2555.93,1459.07 2555.93,1387.07 2666,1277 v1(3562,1277)
  Bottom Layer w15: v1@3560,1279 v1(3562,1277)
JTMS/SWDIO: J1.7 R5.1 U1.46 | length 1544.6
  Top Layer w9: U1.46@2722.13,1451.36 3019.82,1451.36 v1@3023.68,1455.22
  Top Layer w15: v1@3023.68,1455.22 v1(3028.5,1455.22) ; v1(3270,1442) 3270,1100 3313,1057 R5.1@3367,1057 3367,1102 v1(3363,1106)
  Bottom Layer w15: v1@3019,1462 3025.78,1455.22 v1(3028.5,1455.22) 3041.72,1442 3077,1442 ; 3064,1442 3077,1442 ; v1(3270,1442) 3077,1442 ; v1(3363,1106) 3635,1106 3654,1125 3654,1194 3695,1235 J1.7@3726,1235
JTRST/PB4: J1.3 R7.1 U1.56 | length 1681.4
  Top Layer w9: v2(2480,1501) 2499.69,1520.69 U1.56@2499.69,1575.38
  Top Layer w15: v1(3326,1234) 3363,1197 R7.1@3367,1197
  Bottom Layer w10: v2(2480,1501) 2480,1487.93 2535.93,1432 2535.93,1378.78 2678.72,1236 2730,1236
  Bottom Layer w15: 2730,1236 3324,1236 v1(3326,1234) 3599,1234 3654,1289 3654,1398 3691,1435 J1.3@3726,1435
KEY_DOWN: DOWN1.2 U1.51 | length 2690.2
  Top Layer w9: U1.51@2598.12,1575.38 2598.12,1625.72 2678.5,1706.1 2678.5,1712
  Top Layer w15: 2678.5,1712 2678.5,1837 ; 2678.5,1866.5 2678.5,1837 ; DOWN1.2@2811,3621 2806,3616 2726,3616 2678.5,3568.5 2678.5,1837
  Bottom Layer w15: DOWN1.2@2331,3621 DOWN1.2@2811,3621
KEY_ON/OFF: ON/OFF1.2 U1.54 | length 1548.5
  Top Layer w9: U1.54@2539.06,1575.38 2539.06,1647.27 2584.02,1692.23 2584.02,1710
  Top Layer w15: v1(2573,2619) 2584.02,2607.98 2584.02,1710
  Bottom Layer w15: ON/OFF1.2@2331,2621 2333,2619 v1(2573,2619) 2809,2619 ON/OFF1.2@2811,2621
KEY_SET: SET1.2 U1.53 | length 3049.4
  Top Layer w9: U1.53@2558.75,1575.38 2558.75,1640.09 2615.51,1696.85 2615.51,1712
  Top Layer w15: SET1.2@2331,4121 2542,4121 2593.5,4069.5 ; 2615.51,1712 2615.51,3081.38 2593.5,3103.4 2593.5,4069.5 ; SET1.2@2811,4121 2806,4116 2640,4116 2593.5,4069.5
KEY_UP: U1.52 UP1.2 | length 2058.6
  Top Layer w9: U1.52@2578.43,1575.38 2578.43,1632.9 2647.01,1701.48 2647.01,1711
  Top Layer w15: v1(2636,3121) 2647.01,3109.99 2647.01,1711
  Bottom Layer w15: UP1.2@2331,3121 v1(2636,3121) UP1.2@2811,3121
L: C40.1 C41.1 C42.1 C43.1 K1.2 K2.2 K3.2 K4.2 P1.6 | length 7709.2
  Bottom Layer w50: P1.6@3790,123 3790,260 3890,360 3921,391 3999,469 3999,753 ; K4.2@4172,2955 4005,2955 3999,2961 ; K1.2@4186,710 K1.2@4187,709 4043,709 3999,753 ; K2.2@4187,1449 4002,1449 3999,1446 ; K3.2@4187,2209 3999,2209 ; C42.1@4906,2428 C42.1@4907,2429 5029,2429 ; C40.1@4907,929 4985,929 5029,973 5029,1669 ; C41.1@4908,1668 C41.1@4907,1669 5029,1669 ; 3999,753 3999,1446 ; 3999,1446 3999,2209 ; 3999,2209 3999,2961 ; 3999,2961 3999,3243 4072,3316 4828,3316 4907,3237 C43.1@4907,3169 5026,3169 5029,3166 5029,2429 ; 5029,1669 5029,2429
NetC24_1: C24.1 R21.2 U9.3 | length 993.7
  Top Layer w15: C24.1@404,2696 404,2656 425,2635 472,2635 494,2613 R21.2@494,2576 645,2576 725,2656 v1(868,2656) ; v1(988,2656) 1008,2636 U9.3@1261.48,2636
  Bottom Layer w15: v1(868,2656) v1(988,2656)
NetC26_1: C26.1 R25.2 U9.2 | length 1006.4
  Top Layer w15: C26.1@404,2936 404,2897 425,2876 471,2876 494,2853 R25.2@494,2816 773,2816 v1(774,2817) ; v1(972,2815) 1101,2686 U9.2@1261.48,2686
  Bottom Layer w15: v1(774,2817) 970,2817 v1(972,2815)
NetC30_1: C30.1 R33.2 U14.3 | length 1021.5
  Top Layer w15: C30.1@409,2021 409,1981 428,1962 478,1962 499,1941 R33.2@499,1901 707,1901 781,1975 v1(864,1975) ; v1(985,1976) 1085,2076 U14.3@1261.48,2076
  Bottom Layer w15: v1(864,1975) 984,1975 v1(985,1976)